# Altium PCB opo4.PcbDoc
Units mil, origin at the board's own origin, x right, y up, seen from the top; angles counter-clockwise.
Board outline 1300 x 1300 mil, 4 copper layers (Top Layer, Signal Layer 1, Signal Layer 2, Bottom Layer), stack 30.634 mil thick; 113 components, 90 nets, 438 pads, 181 vias.
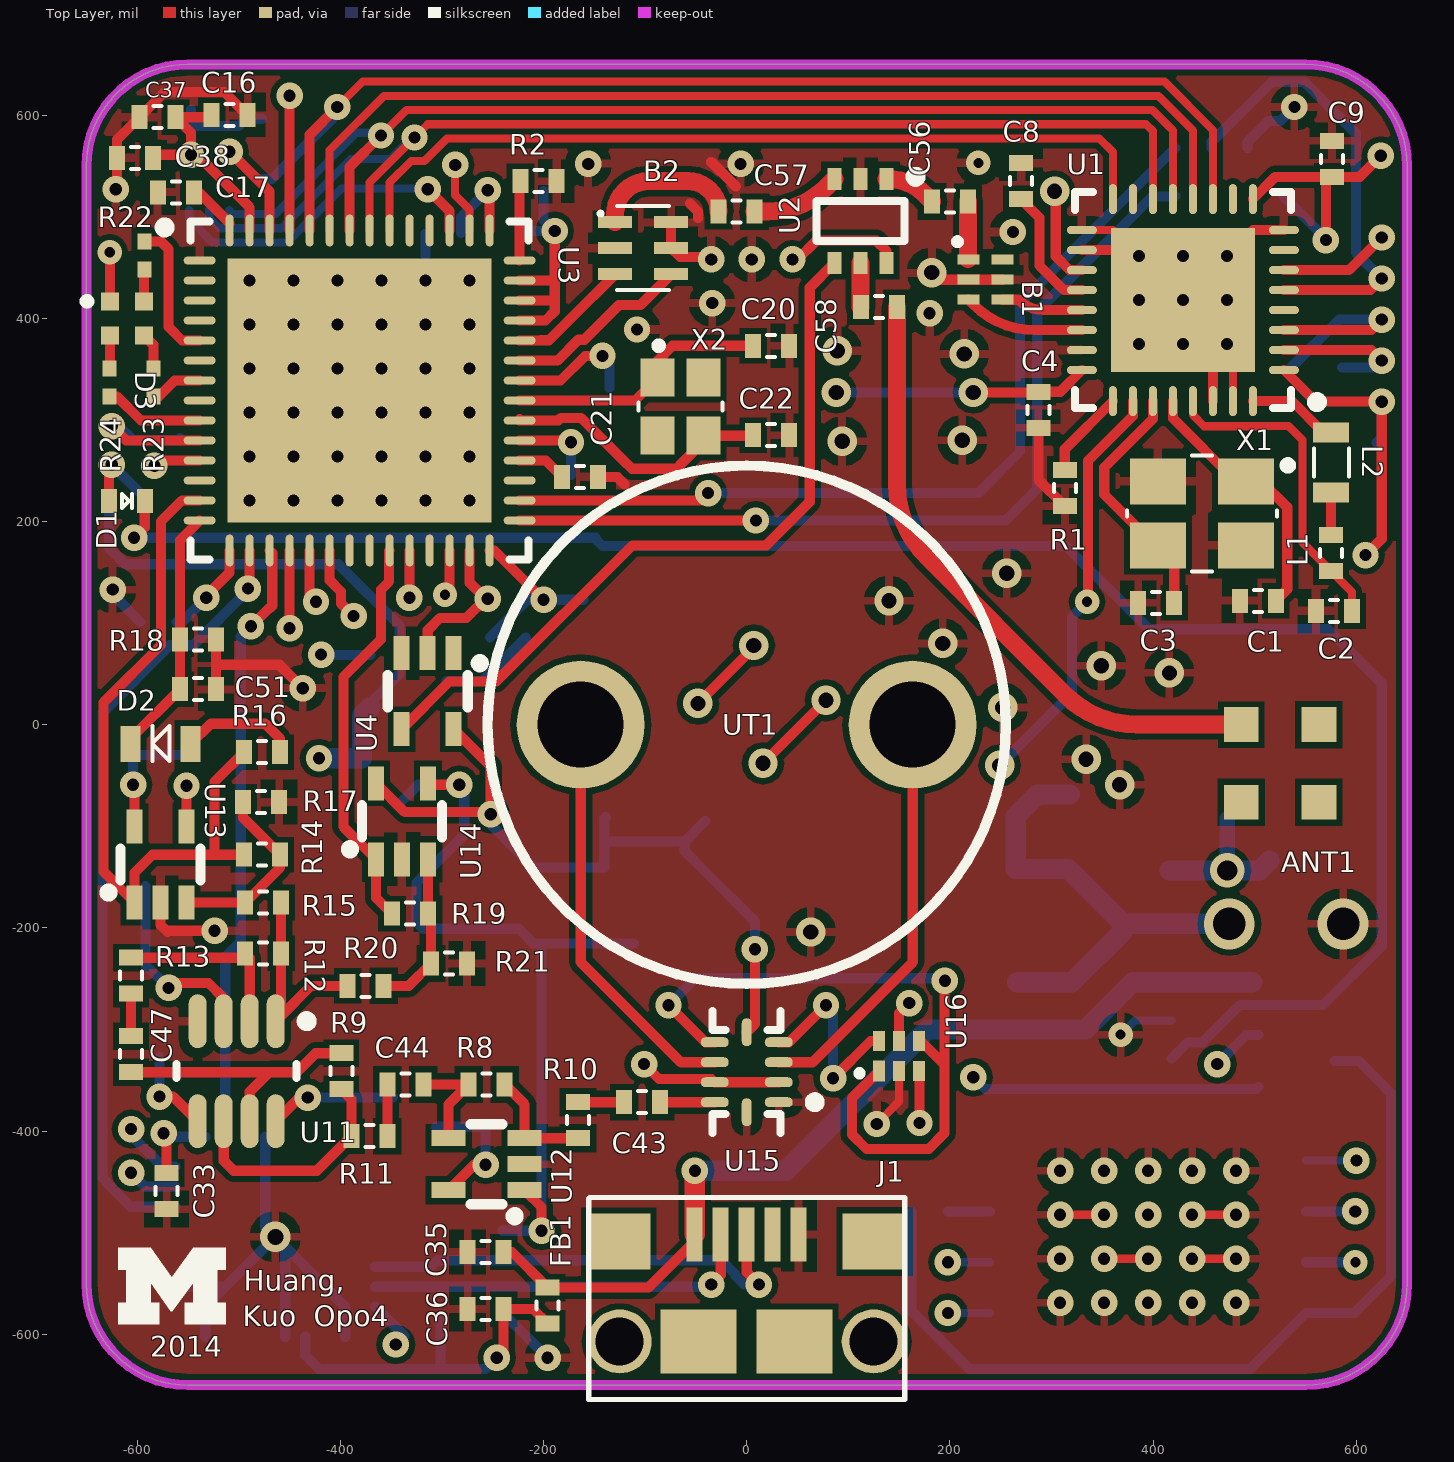
[diagram p0: Top Layer view]
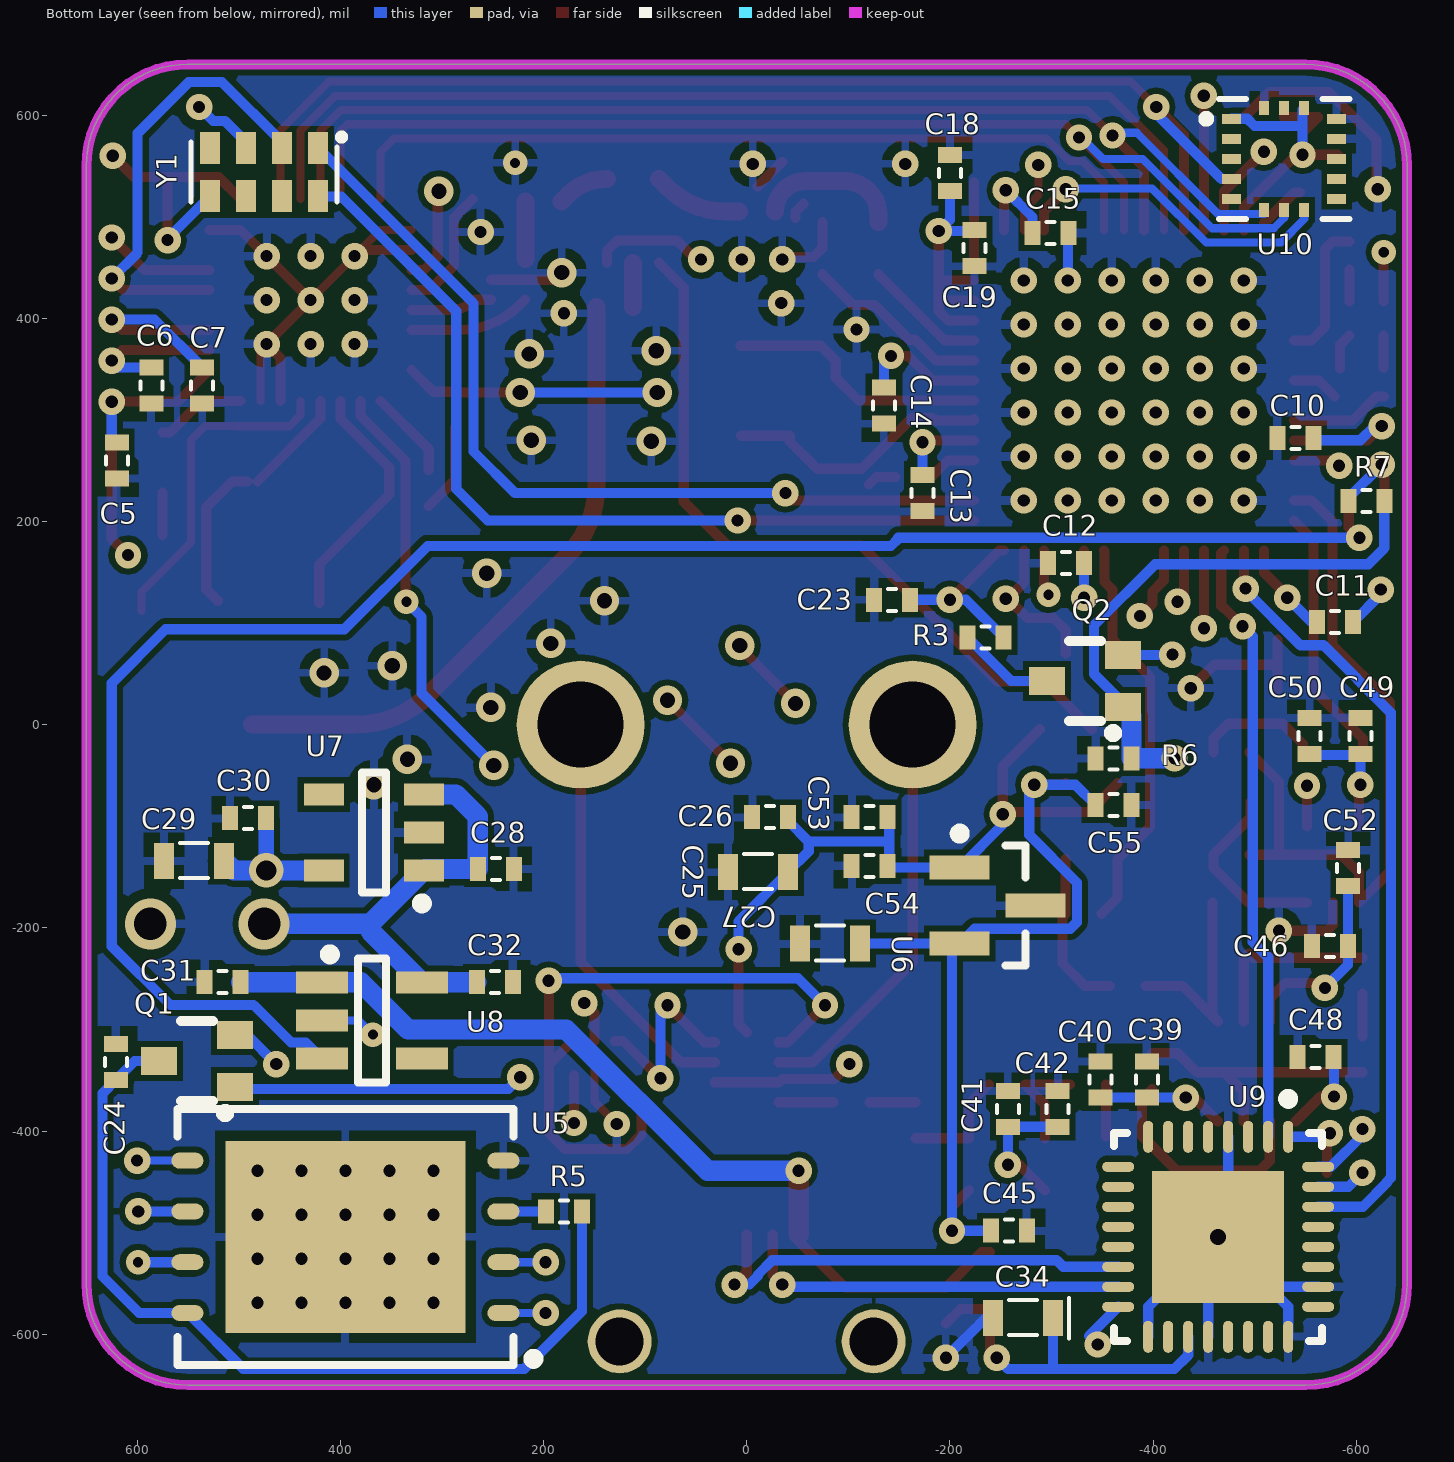
[diagram p1: Bottom Layer view, seen from below]
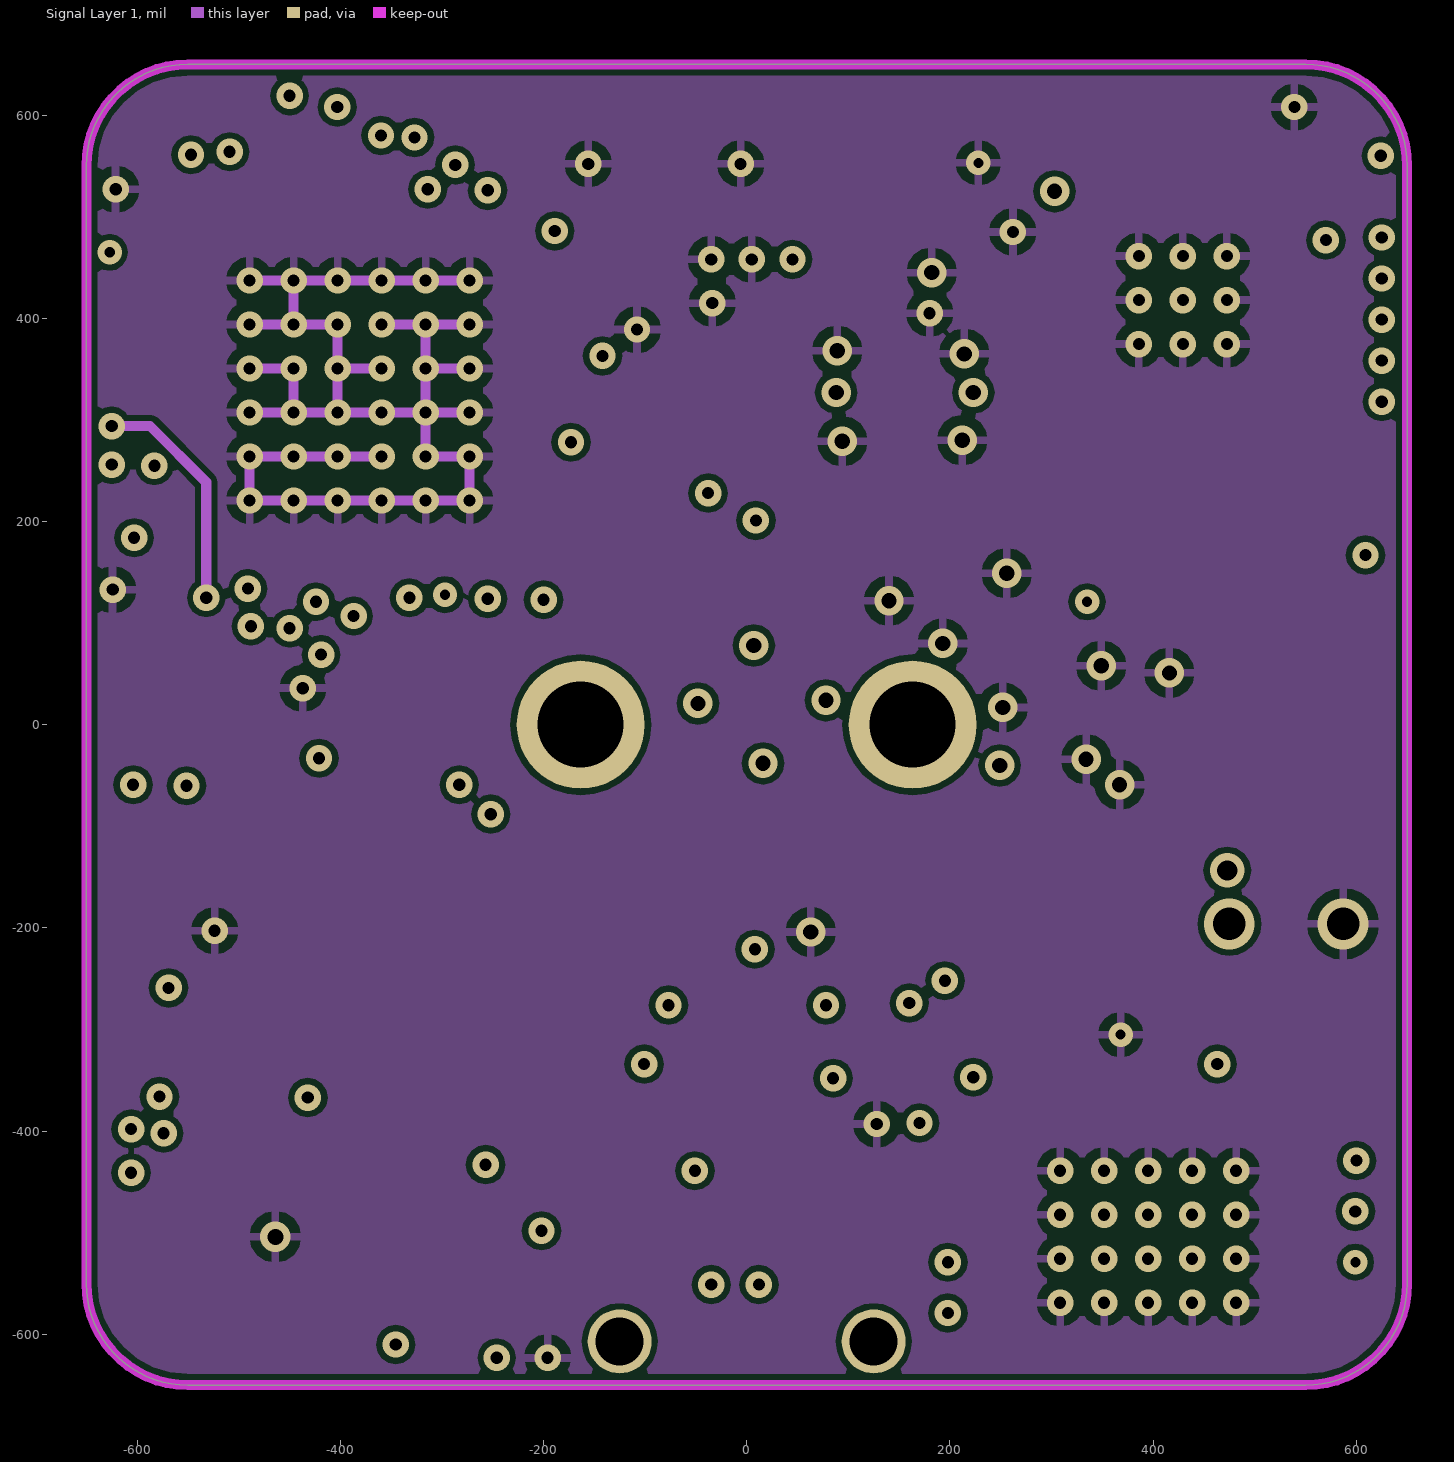
[diagram p2: Signal Layer 1]
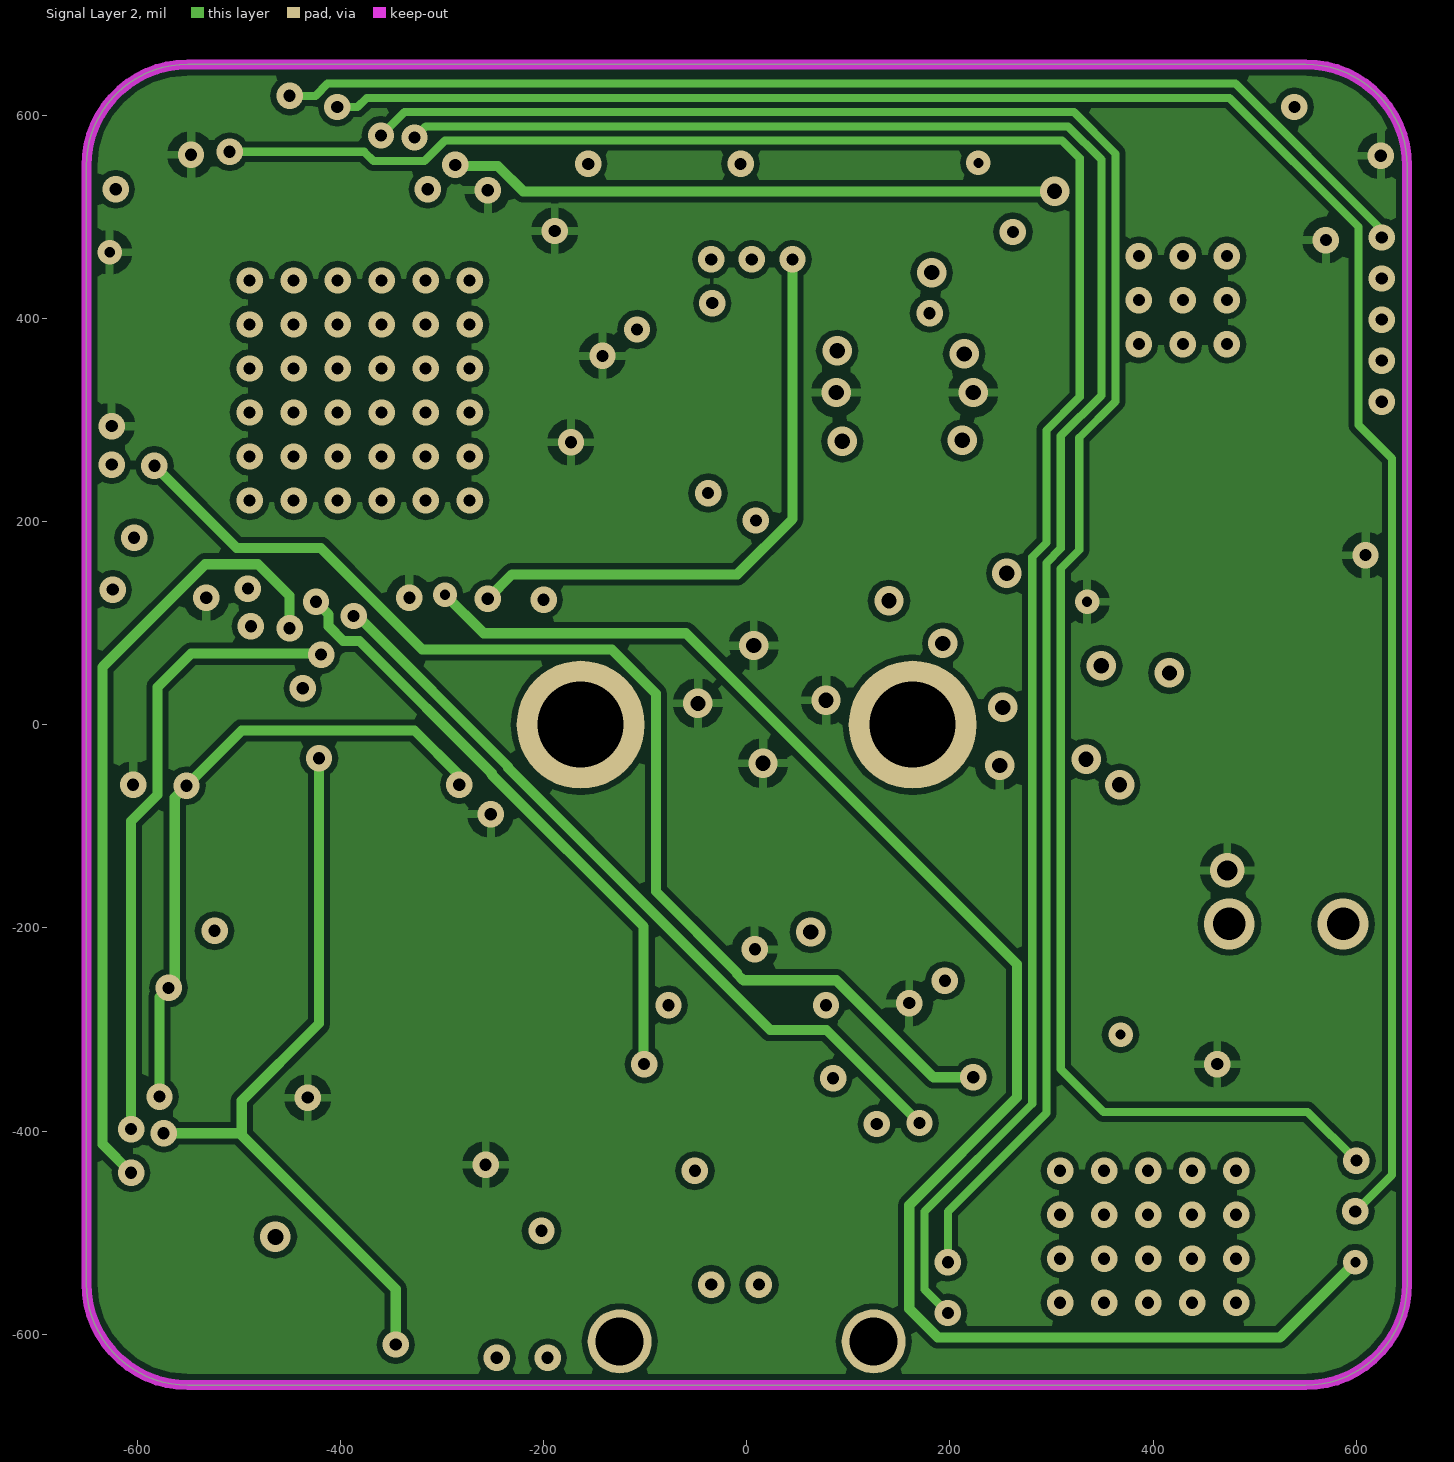
[diagram p3: Signal Layer 2]

## Layer stack, top to bottom
Top Solder: solder mask 0.4, Solder Resist, Dk 3.5
Top Layer: signal copper 1.4
Dielectric 1: core 10, FR-4, Dk 4.2
Signal Layer 1: signal copper 1.417
Dielectric 3: prepreg 5, Dk 4.2
Signal Layer 2: signal copper 1.417
Dielectric 2: core 10, Dk 4.2
Bottom Layer: signal copper 1.4
Bottom Solder: solder mask 0.4, Solder Resist, Dk 3.5

## Board outline
-550,-650 cw(c-550,-550) -650,-550 -650,550 cw(c-550,550) -550,650 550,650 cw(c550,550) 650,550 650,-550 cw(c550,-550) 550,-650

## Design rules (kind name [scope] priority, off if disabled: settings)
Clearance "Clearance~Sunstone Circuits" [All] p1: gap=6 // Sunstone Circuits Minimum Clearance Rule (MLB~4&6 Layer Designs)
DiffPairsRouting [All] p1: maxlimit=10 minlimit=10 mostfreqgap=10 toplayer_minwidth=10 toplayer_maxwidth=15 toplayer_prefwidth=15 midlayer1_minwidth=10 midlayer1_maxwidth=15 midlayer1_prefwidth=15 midlayer2_minwidth=10 midlayer2_maxwidth=15 midlayer2_prefwidth=15 bottomlayer_minwidth=10 bottomlayer_maxwidth=15 bottomlayer_prefwidth=15 maxuncoupledlength=500
HoleSize "HoleSize~Sunstone Circuits" [All] p1: absolutevalues=TRUE maxlimit=251 minlimit=8 maxpercent=80.000 minpercent=20.000 // Sunstone Circuits Hole Size Rule (MLB~4&6 Layer Designs)
HoleSize Testpoint [All] p2: absolutevalues=TRUE maxlimit=100 minlimit=1 maxpercent=80.000 minpercent=20.000
HoleSize TestPointUsage [All] p3: absolutevalues=TRUE maxlimit=100 minlimit=1 maxpercent=80.000 minpercent=20.000
MinimumAnnularRing "MinimumAnnularRing~Sunstone Circuits" [All] p1: minimumring=7 // Sunstone Circuits Minimum Annular Ring (MLB~4&6 Layer Designs)
MinimumSolderMaskSliver [All] p1 off: minsoldermaskwidth=10
PlaneClearance "PlaneClearance~Sunstone Circuits" [All] p1: clearance=12 // Sunstone Circuits Power Plane Clearance Rule (MLB~4&6 Layer Designs)
PlaneConnect "PlaneConnect~Sunstone Circuits" [All] p1: planeconnectstyle=Relief reliefexpansion=10 reliefentries=4 reliefconductorwidth=8 reliefairgap=10 // Sunstone Circuits Power Plane Connect Rule (MLB~4&6 Layer Designs)
PolygonConnect "PolygonConnect~Sunstone Circuits" [All] p1: connectstyle=Relief reliefconductorwidth=8 reliefentries=4 polygonreliefangle="90 Angle" airgapwidth=10 // Sunstone Circuits Polygon Connect Style (MLB~4&6 Layer Designs)
RoutingVias "RoutingVias~Sunstone Circuits" [All] p1: holewidth=16 width=30 viastyle="Through Hole" minholewidth=8 minwidth=24 maxholewidth=20 maxwidth=40 // Sunstone Circuits Routing Vias Rule (MLB~4&6 Layer Designs)
ShortCircuit "ShortCircuit~Sunstone Circuits" [All] p1: allowed=FALSE // Sunstone Circuits Short Circuit Rule~Do Not Allow (MLB~4&6 Layer Designs)
SilkToSolderMaskClearance [IsPad] p1 off: minsilkscreentomaskgap=10 clearancetoexposedcopper=TRUE
SolderMaskExpansion ViaTenting [isVia] p1: expansion=-20 // Sunstone Circuits Solder Mask Expansion Rule (MLB~4&6 Layer Designs)
SolderMaskExpansion "SolderMaskExpansion~Sunstone Circuits" [All] p2: expansion=3 // Sunstone Circuits Solder Mask Expansion Rule (MLB~4&6 Layer Designs)
UnpouredPolygon [All] p1: allowunpoured=FALSE
ViasUnderSMD "ViasUnderSMD~Sunstone Circuits" [All] p1: allowed=FALSE // Sunstone Circuits Vias Under SMD~Do Not Allow (MLB~4&6 Layer Designs)
Width "Width~Sunstone Circuits" [All] p1: maxlimit=100 minlimit=6 preferedwidth=10 // Sunstone Circuits Minimum Width Rule (MLB~4&6 Layer Designs)
22 further rules are at their usual default settings.

## Classes and differential pairs
component class bluetooth: B1 C1 C2 C3 C4 C5 C6 C7 C8 C9 L1 L2 R1 U1 X1
component class mcu: ANT1 B2 C10 C11 C12 C13 C14 C15 C16 C17 C18 C19 C20 C21 C22 C23 C24 C56 C57 C58 D3 Q1 Q2 R2 R3 R5 R6 R22 R23 R24 U2 U3 U4 U5 X2
component class power: C25 C26 C27 C28 C29 C30 U6 U7
component class programmer_charger: C31 C32 C33 C34 C35 C36 D1 FB1 J1 R7 U8 U9
component class rtc_accel: C37 C38 U10 Y1
component class ul_rx: C39 C40 C41 C42 C43 C44 C45 C46 C47 C48 C49 C50 C51 C52 C53 C54 C55 D2 R8 R9 R10 R11 R12 R13 R14 R15 R16 R17 R18 R19 R20 R21 U11 U12 U13 U14
component class ul_tx_ctrl: U15 U16 UT1
differential pair RF: +RF_P -RF_N
differential pair BLE_ANT: +BLE_ANT_P -BLE_ANT_N

## Components (designator, comment, footprint, x,y, rotation, side; value= is the part's Value field where it differs from the comment)
ANT1 "Ground Antenna" "SMD Ground Antenna" 525,-38 r270 top
B1 "2450BM14A0002" 2450BM14A0002 235,438 r90 top
B2 "BALUN" 2450BM15A0002 -102,469 r0 top
C1 "15pF 0402 ceramic cap" 0402 503,122 r180 top
C2 "Ceramic capacitor" 0402 578,112 r180 top
C3 "15pF 0402 ceramic cap" 0402 403,120 r0 top
C4 "Ceramic capacitor" 0402 287,310 r270 top
C5 "4.7uF" 0402 620,260 r270 bottom
C6 "Ceramic capacitor" 0402 586,334 r270 bottom
C7 "33nF" 0402 536,334 r270 bottom
C8 "2.2nF" 0402 270,535 r90 top
C9 "Ceramic capacitor" 0402 576,557 r90 top
C10 "Ceramic capacitor" 0402 -540,282 r0 bottom
C11 "Ceramic capacitor" 0402 -579,101 r180 bottom
C12 "Ceramic capacitor" 0402 -314,159 r0 bottom
C13 "Ceramic capacitor" 0402 -173,228 r270 bottom
C14 "Ceramic capacitor" 0402 -135,314 r270 bottom
C15 "Ceramic capacitor" 0402 -299,484 r180 bottom
C16 "Ceramic capacitor" 0402 -509,600 r0 top
C17 "Ceramic capacitor" 0402 -562,524 r180 top
C18 "Ceramic capacitor" 0402 -200,543 r90 bottom
C19 "220pF 0402 ceramic cap" 0402 -224,469 r270 bottom
C20 "13pf 0402 Cap" 0402 24,373 r0 top
C21 "Ceramic capacitor" 0402 -164,244 r0 top
C22 "13pf 0402 Cap" 0402 24,285 r180 top
C23 "Ceramic capacitor" 0402 -143,123 r0 bottom
C24 "Ceramic capacitor" 0402 621,-332 r270 bottom
C25 "Ceramic capacitor" 0603 -11,-145 r0 bottom
C26 "Ceramic capacitor" 0402 -23,-91 r0 bottom
C27 "Ceramic capacitor" 0603 -82,-215.4 r0 bottom
C28 "Ceramic capacitor" 0402 247,-142 r180 bottom
C29 "Ceramic capacitor" 0603 544,-134 r0 bottom
C30 "Ceramic capacitor" 0402 491,-92 r0 bottom
C31 "Ceramic capacitor" 0402 516,-253 r0 bottom
C32 "Ceramic capacitor" 0402 248,-253 r180 bottom
C33 "Ceramic capacitor" 0402 -571,-459 r270 top
C34 "Tantalum capacitor" "0603 - Polar Marking" -272,-584 r0 bottom
C35 "Ceramic capacitor" 0402 -257,-519 r180 top
C36 "Ceramic capacitor" 0402 -257,-575 r180 top
C37 "Ceramic capacitor" 0402 -580,598 r180 top
C38 "Ceramic capacitor" 0402 -602,558 r180 top
C39 "Ceramic capacitor" 0402 -394,-349 r90 bottom
C40 "Ceramic capacitor" 0402 -348,-349 r90 bottom
C41 "Ceramic capacitor" 0402 -257,-378 r90 bottom
C42 "Ceramic capacitor" 0402 -306,-378 r90 bottom
C43 "Ceramic capacitor" 0402 -103,-371.53 r180 top
C44 "Ceramic capacitor" 0402 -336,-354 r180 top
C45 "Ceramic capacitor" 0402 -258,-498 r180 bottom
C46 "Ceramic capacitor" 0402 -574,-218 r0 bottom
C47 "Ceramic capacitor" 0402 -606,-324.28 r90 top
C48 "Ceramic capacitor" 0402 -560,-327 r0 bottom
C49 "Ceramic capacitor" 0402 -604,-11 r90 bottom
C50 "Ceramic capacitor" 0402 -554,-11 r90 bottom
C51 "Ceramic capacitor" 0402 -540,35 r0 top
C52 "Ceramic capacitor" 0402 -592,-141 r90 bottom
C53 "Ceramic capacitor" 0402 -121,-91 r0 bottom
C54 "Ceramic capacitor" 0402 -121,-139 r0 bottom
C55 "Ceramic capacitor" 0402 -361,-79 r180 bottom
C56 "Ceramic Capacitor" 0402 200,515 r180 top
C57 "Ceramic Capacitor" 0402 -10,505 r180 top
C58 "Ceramic Capacitor" 0402 130,411 r0 top
D1 "LED, Green" "0402 - DIODE" -610,220 r0 top
D2 "Schottky diode" "0603 - DIODE" -577,-19 r180 top
D3 "Tri Color LED" 0404 -610,400 r0 top
FB1 "Ferrite Bead" 0402 -196,-571.72 r90 top
J1 "micro USB-B" "Micro USB-B" 0,-607 r0 top
L1 "15nH chip inductor" 0402 575,169 r90 top
L2 "10uH chip inductor" 0603 575,258 r90 top
Q1 "DMG1013UW" SC70-3 541,-331 r90 bottom
Q2 "Si1300BDL" SC70-3 -333,43 r90 bottom
R1 "22k 0402 resistor" 0402 313,233 r270 top
R2 "56k 0402 Res" 0402 -205,535 r0 top
R3 "2.2 Ohm 0402 Res" 0402 -235,86 r0 bottom
R5 "Chip resistor" 0402 180,-479 r0 bottom
R6 "Chip resistor" 0402 -361,-33 r0 bottom
R7 "Chip resistor" 0402 -610,220 r0 bottom
R8 "Chip resistor" 0402 -256,-354 r180 top
R9 "Chip resistor" 0402 -399,-341 r90 top
R10 "Chip resistor" 0402 -166,-389.24 r270 top
R11 "Chip resistor" 0402 -371.43,-405 r180 top
R12 "Chip resistor" 0402 -476,-225 r0 top
R13 "Chip resistor" 0402 -606,-247 r270 top
R14 "Chip resistor" 0402 -477,-127.93 r180 top
R15 "Chip resistor" 0402 -476,-175 r180 top
R16 "Chip resistor" 0402 -477,-27 r0 top
R17 "Chip resistor" 0402 -478,-76 r0 top
R18 "Chip resistor" 0402 -540,84 r0 top
R19 "Chip resistor" 0402 -331.43,-186 r180 top
R20 "Chip resistor" 0402 -375,-257 r0 top
R21 "Chip resistor" 0402 -293,-235 r0 top
R22 "Chip Resistor" 0201 -593,462 r90 top
R23 "Chip resistor" 0201 -584,337 r270 top
R24 "Chip resistor" 0201 -627,337 r270 top
U1 "nrf8001" QFN50P500X500X90_HS-33N 429.31,418 r180 top
U2 "uPG2214TB" minimold-6 112,496 r270 top
U3 "cc2538" QFN50P800X800X100_HS-57N -381,329 r0 top
U4 "NC7S14P5X" SC70-5 -314,33 r180 top
U5 "SST25VF064C" WSON 395,-504 r0 bottom
U6 "ISL60002" SOT23-3N -247,-178 r180 bottom
U7 "ADP162" TSOT23-5 367,-106 r0 bottom
U8 "MAX1555" SOT23-5 369,-291 r180 bottom
U9 "FT232RQ" QFN-32 -464,-504 r270 bottom
U10 "ADXL362" LGA_CC-16-4 -529,557 r180 bottom
U11 "MIC863" TSOP65P280X145-8N -502,-341 r270 top
U12 "MIC861" SC70-5 -256,-432.55 r90 top
U13 "TS881" SC70-5 -577,-137.6 r0 top
U14 "TS881" SC70-5 -339.31,-95 r0 top
U15 "NX3L4684" QFN50P155X200X13-10N 0,-342 r180 top
U16 "NC7WZ14L6X" NC7WZ14L6X 150,-326 r0 top
UT1 "400EP250" "Transducer recepticle" 0,0 r0 top
X1 "16MHz Crystal" TSX-3225 448,208 r180 top
X2 "32 MHz Crystal" FA-128 -65,313 r270 top
Y1 "RV-4162-C7" RV4162 475,544 r0 bottom

## Footprints (in the part's own frame and the unit in brackets; to place one, negate y for a bottom-side part, rotate by r counter-clockwise, add the part's x,y. Pads: shape width x height; smd on the part's side, far side on the other; paste and mask are expansions set on the pad)
0201 [mm] "Chip Resistor, 2-Leads, Body 0.60x0.30mm, IPC Medium Density"
  rect 0.4x0.35 smd: 1(-0.35,0) 2(0.35,0)
  body extent -0.31,-0.16 0.32,0.17, height 0.26
0402 [mm] "2-Leads, Body 1.00x0.50mm, IPC Medium Density"
  rect 0.4x0.6 smd: 1(-0.45,0) 2(0.45,0)
  silkscreen extent -0.1,-0.28 0.1,0.28, body extent -0.53,-0.28 0.53,0.27, height 0.4
"0402 - DIODE" [mm] "2-Leads, Body 1.00x0.50mm, IPC Medium Density"
  rect 0.4x0.6 smd: 1(-0.45,0) 2(0.45,0)
  silkscreen extent -0.13,-0.18 0.13,0.18, body extent -0.53,-0.28 0.53,0.27, height 0.4
0404 [mm]
  rect 0.45x0.45 smd: 1(-0.425,0.425) 2(0.425,0.425) 3(0.425,-0.425) 4(-0.425,-0.425)
  silkscreen extent -1.06,0.37 -0.94,0.48, body extent -0.5,-0.5 0.5,0.5, height 0.2
0603 [mm] "2-Leads, Body 1.55x0.85mm, IPC Medium Density"
  rect 0.5x0.9 smd: 1(-0.75,0) 2(0.75,0)
  silkscreen extent -0.35,-0.45 0.35,0.43, body extent -0.75,-0.42 0.75,0.43, height 0.5
"0603 - DIODE" [mm] "2-Leads, Body 1.55x0.85mm, IPC Medium Density"
  rect 0.5x0.9 smd: 1(-0.75,0) 2(0.75,0)
  silkscreen extent -0.23,-0.45 0.2,0.43, body extent -0.75,-0.42 0.75,0.43, height 0.5
"0603 - Polar Marking" [mm] "2-Leads, Body 1.55x0.85mm, IPC Medium Density"
  rect 0.5x0.9 smd: 1(-0.75,0) 2(0.75,0)
  silkscreen extent -1.14,-0.51 0.35,0.51, body extent -0.75,-0.42 0.75,0.43, height 0.5
2450BM14A0002 [mm]
  rect 0.25x0.55 smd: 1(0.5,0.425) 2(0,0.425) 3(-0.5,0.425) 4(-0.5,-0.425) 5(0,-0.425) 6(0.5,-0.425)
  silkscreen extent 0.91,0.66 0.99,0.74, body extent -0.8,-0.4 0.8,0.4, height 0.6
2450BM15A0002 [mm] "Chip Array, Flat, 6-Leads, Pitch 0.65mm,  Body 2.00x1.25mm,  IPC Medium Density"
  rect 0.85x0.3 smd: 1(-0.7,0.65) 2(-0.7,0) 3(-0.7,-0.65) 4(0.7,-0.65) 5(0.7,0) 6(0.7,0.65)
  silkscreen extent -1.11,-1.05 0.65,1.05, body extent -0.67,-1.05 0.67,1.05, height 0.81
FA-128 [mm]
  rect 0.95x0.85 smd: 1(-0.725,-0.575) 2(0.725,-0.575) 3(0.725,0.575) 4(-0.725,0.575)
  silkscreen extent -1.58,-1.05 0.1,1.05
LGA_CC-16-4 [mm]
  rect 0.475x0.25 smd: 1(-1.313,1) 2(-1.313,0.5) 3(-1.313,0) 4(-1.313,-0.5) 5(-1.313,-1) 9(1.313,-1) 10(1.313,-0.5) 11(1.313,0) 12(1.313,0.5) 13(1.313,1)
  rect 0.25x0.35 smd: 6(-0.5,-1.275) 7(0,-1.275) 8(0.5,-1.275) 14(0.5,1.275) 15(0,1.275) 16(-0.5,1.275)
  silkscreen extent -2.02,-1.5 1.63,1.5, body extent -1.63,-1.5 1.63,1.5, height 1.15
"Micro USB-B" [mm]
  rect 0.4x1.35 smd mask+0.1: 1(-1.3,2.675) 2(-0.65,2.675) 3(0,2.675) 4(0.65,2.675) 5(1.3,2.675)
  rect 1.6x1.4 smd mask+0.1: 6(-3.2,2.5) 6(3.2,2.5)
  round 1.6 hole 1.2: 6(-3.175,0) 6(3.175,0)
  rect 1.9x1.6 smd mask+0.1: 6(-1.2,0) 6(1.2,0)
  silkscreen extent -3.95,-1.45 3.95,3.6
minimold-6 [mm] "SOTFL, 6-Leads, Body 2.00x2.10mm, Pitch 0.65mm, IPC Medium Density"
  rect 0.55x0.35 smd: 1(-1.05,0.65) 2(-1.05,0) 3(-1.05,-0.65) 4(1.05,-0.65) 5(1.05,0) 6(1.05,0.65)
  silkscreen extent -1.22,-1.1 0.5,1.5, body extent -0.67,-1.1 0.67,1.1, height 1
NC7WZ14L6X [mm]
  rect 0.3x0.52 smd: 1(-0.5,-0.375)
  rect 0.3x0.49 smd: 2(0,-0.375) 3(0.5,-0.375) 4(0.5,0.375) 5(0,0.375) 6(-0.5,0.375)
  silkscreen extent -1.02,-0.46 -0.97,-0.41, body extent -0.72,-0.5 0.72,0.5, height 0.55
QFN50P155X200X13-10N [mm] "QFN, 10-Leads, Body 2.1x1.6mm (max), Pitch 0.50mm, IPC Medium Density"
  oval 0.7x0.25 smd: 1(-0.8,0.75) 2(-0.8,0.25) 3(-0.8,-0.25) 4(-0.8,-0.75) 6(0.8,-0.75) 7(0.8,-0.25) 8(0.8,0.25) 9(0.8,0.75)
  oval 0.25x0.7 smd: 5(0,-1) 10(0,1)
  silkscreen extent -1.83,-1.53 0.85,1.53, body extent -0.83,-1.05 0.82,1.05, height 0.13
QFN50P500X500X90_HS-33N [mm] "QFN, 32-Leads, Body 5.00x5.00mm, Pitch 0.50mm, Thermal Pad 3.60x3.60mm, IPC Medium Density"
  oval 0.75x0.2 smd: 1(-2.525,1.75) 2(-2.525,1.25) 3(-2.525,0.75) 4(-2.525,0.25) 5(-2.525,-0.25) 6(-2.525,-0.75) 7(-2.525,-1.25) 8(-2.525,-1.75) 17(2.525,-1.75) 18(2.525,-1.25) 19(2.525,-0.75) 20(2.525,-0.25) 21(2.525,0.25) 22(2.525,0.75) 23(2.525,1.25) 24(2.525,1.75)
  oval 0.2x0.75 smd: 9(-1.75,-2.525) 10(-1.25,-2.525) 11(-0.75,-2.525) 12(-0.25,-2.525) 13(0.25,-2.525) 14(0.75,-2.525) 15(1.25,-2.525) 16(1.75,-2.525) 25(1.75,2.525) 26(1.25,2.525) 27(0.75,2.525) 28(0.25,2.525) 29(-0.25,2.525) 30(-0.75,2.525) 31(-1.25,2.525) 32(-1.75,2.525)
  rect 3.6x3.6 smd: 33(0,0)
  silkscreen extent -3.47,-2.7 2.7,2.7, body extent -2.55,-2.55 2.55,2.55, height 0.9
QFN50P800X800X100_HS-57N [mm] "QFN, 56-Leads, Body 8.00x8.00mm, Pitch 0.50mm, Thermal Pad 6.60x6.60mm, IPC Medium Density"
  oval 0.8x0.2 smd: 1(-4,3.25) 2(-4,2.75) 3(-4,2.25) 4(-4,1.75) 5(-4,1.25) 6(-4,0.75) 7(-4,0.25) 8(-4,-0.25) 9(-4,-0.75) 10(-4,-1.25) 11(-4,-1.75) 12(-4,-2.25) 13(-4,-2.75) 14(-4,-3.25) 29(4,-3.25) 30(4,-2.75) 31(4,-2.25) 32(4,-1.75) 33(4,-1.25) 34(4,-0.75) 35(4,-0.25) 36(4,0.25) 37(4,0.75) 38(4,1.25) 39(4,1.75) 40(4,2.25) 41(4,2.75) 42(4,3.25)
  oval 0.2x0.8 smd: 15(-3.25,-4) 16(-2.75,-4) 17(-2.25,-4) 18(-1.75,-4) 19(-1.25,-4) 20(-0.75,-4) 21(-0.25,-4) 22(0.25,-4) 23(0.75,-4) 24(1.25,-4) 25(1.75,-4) 26(2.25,-4) 27(2.75,-4) 28(3.25,-4) 43(3.25,4) 44(2.75,4) 45(2.25,4) 46(1.75,4) 47(1.25,4) 48(0.75,4) 49(0.25,4) 50(-0.25,4) 51(-0.75,4) 52(-1.25,4) 53(-1.75,4) 54(-2.25,4) 55(-2.75,4) 56(-3.25,4)
  rect 6.6x6.6 smd: 57(0,0)
  silkscreen extent -5,-4.23 4.23,4.23, body extent -4.08,-4.08 4.08,4.08, height 1
QFN-32 [mm] "32-Pin QFN 0.5 mm Pitch"
  oval 0.8x0.25 smd: 1(-2.5,1.75) 2(-2.5,1.25) 3(-2.5,0.75) 4(-2.5,0.25) 5(-2.5,-0.25) 6(-2.5,-0.75) 7(-2.5,-1.25) 8(-2.5,-1.75) 17(2.5,-1.75) 18(2.5,-1.25) 19(2.5,-0.75) 20(2.5,-0.25) 21(2.5,0.25) 22(2.5,0.75) 23(2.5,1.25) 24(2.5,1.75)
  oval 0.25x0.8 smd: 9(-1.75,-2.5) 10(-1.25,-2.5) 11(-0.75,-2.5) 12(-0.25,-2.5) 13(0.25,-2.5) 14(0.75,-2.5) 15(1.25,-2.5) 16(1.75,-2.5) 25(1.75,2.5) 26(1.25,2.5) 27(0.75,2.5) 28(0.25,2.5) 29(-0.25,2.5) 30(-0.75,2.5) 31(-1.25,2.5) 32(-1.75,2.5)
  rect 3.3x3.3 smd: 33(0,0)
  silkscreen extent -3.57,-2.6 2.6,2.6, body extent -2.58,-2.58 2.58,2.58, height 0.8
RV4162 [mm] "RTC"
  rect 0.5x0.8 smd: 1(-1.35,-0.6) 2(-0.45,-0.6) 3(0.45,-0.6) 4(1.35,-0.6) 5(1.35,0.6) 6(0.45,0.6) 7(-0.45,0.6) 8(-1.35,0.6)
  silkscreen extent -1.97,-0.91 1.83,0.75, body extent -1.6,-0.75 1.6,0.75, height 0.8
SC70-3 [mm]
  rect 0.7x0.9 smd: 1(-0.65,-0.95) 2(0.65,-0.95) 3(0,0.95)
  silkscreen extent -1.4,-0.8 1,0.4, body extent -0.9,-0.6 0.9,0.6, height 0.8
SC70-5 [mm]
  rect 0.4x0.85 smd: 1(-0.65,-0.95) 2(0,-0.95) 3(0.65,-0.95) 4(0.65,0.95) 5(-0.65,0.95)
  silkscreen extent -1.4,-0.8 1,0.4, body extent -0.9,-0.6 0.9,0.6, height 0.8
"SMD Ground Antenna" [mm] "0479480001"
  rect 0.87x0.87 smd mask+0.335: 1(-0.97,-0.97) 2(0.97,-0.97) 3(0.97,0.97) 4(-0.97,0.97)
  body extent -1.5,-1.5 1.5,1.5, height 4
SOT23-3N [mm] "SOT23, 3-Leads, Body 2.9x1.3mm, Pitch 0.95mm, Lead Span 2.5mm, IPC Medium Density"
  rect 1.5x0.6 smd: 1(-0.95,0.95) 2(-0.95,-0.95) 3(0.95,0)
  silkscreen extent -1.07,-1.5 0.7,1.92, body extent -0.7,-1.5 0.7,1.5, height 1.1
SOT23-5 [mm] "SOT23, 5-Leads, Body 2.9x1.6mm, Pitch 0.95mm, Lead Span 2.8mm, IPC High Density"
  rect 1.3x0.55 smd: 1(-1.25,0.95) 2(-1.25,0) 3(-1.25,-0.95) 4(1.25,-0.95) 5(1.25,0.95)
  silkscreen extent -1.18,-1.55 0.35,1.77, body extent -0.67,-1.5 0.65,1.5, height 1.45
"Transducer recepticle" [mm] "Transducer with Pin Recepticle"
  round 3.2 hole 2.15: 1(-4.15,0) 2(4.15,0)
  body extent -6.45,-6.49 6.5,6.49, height 14
TSOP65P280X145-8N [mm] "TSOP, 8-Leads, Body 2.90x1.60mm, Pitch 0.65mm, IPC Medium Density"
  oval 1.35x0.45 smd: 1(-1.25,0.975) 2(-1.25,0.325) 3(-1.25,-0.325) 4(-1.25,-0.975) 5(1.25,-0.975) 6(1.25,-0.325) 7(1.25,0.325) 8(1.25,0.975)
  silkscreen extent -1.37,-1.5 0.18,1.88, body extent -0.85,-1.5 0.85,1.5, height 1.45
TSOT23-5 [mm] "SOT23, 6-Leads, Body 3.0x2.9mm (max), Pitch 0.95mm, IPC Medium Density"
  rect 1x0.55 smd: 1(-1.25,0.95) 2(-1.25,0) 3(-1.25,-0.95) 4(1.25,-0.95) 5(1.25,0.95)
  silkscreen extent -1.32,-1.5 0.3,1.9, body extent -0.87,-1.5 0.87,1.5, height 1
TSX-3225 [mm]
  rect 1.4x1.15 smd: 1(-1.1,-0.8) 2(1.1,-0.8) 3(1.1,0.8) 4(-1.1,0.8)
  silkscreen extent -2.23,-1.45 1.88,1.45
WSON [mm] "QFN, 8-Leads, Body 8.00x6.00mm, Pitch 1.27mm, Thermal Pad 6.00x4.80mm, IPC Medium Density"
  oval 0.8x0.4 smd: 1(-3.95,1.905) 2(-3.95,0.635) 3(-3.95,-0.635) 4(-3.95,-1.905) 5(3.95,-1.905) 6(3.95,-0.635) 7(3.95,0.635) 8(3.95,1.905)
  rect 6x4.8 smd: 9(0,0)
  silkscreen extent -4.82,-3.2 4.2,3.2, body extent -4.05,-3.05 4.05,3.05, height 0.8

## Part data
ANT1: library part "Molex Antenna", "Molex 2.4 GHz SMD On-Ground Antenna"
B1: library part nrf8001_balun, "nrf8001 chip balun"
B2: library part cc2538_Balun, "Johanson CC253X Balun"
C1 C3: library part C_15p_0402_ceramic, "15pF, 2%, NP0, 0402"
C2 C16 C17 C21 C28 C30 C31 C32 C43: library part C_1u_0402_ceramic, "Ceramic capacitor, 1 uF, 0402 package"
C4 C23 C51: library part C_1000p_0402_ceramic, "Ceramic capacitor, 1000 pF, 0402 package"
C5: library part C_4.7u_0402_ceramic, "4.7 uF 10% 0402 6.3V X5R ceramic cap"
C6 C9 C10 C11 C12 C13 C14 C15 C18 C24 C26 C33 C35 C36 C37 C38 C39 C41 C45 C46 C48 C49 C52 C53 C55: library part C_0.1u_0402_ceramic, "Ceramic capacitor, 0.1u, 0402 package"
C7: library part C_0.033uF_0402_ceramic, "33nF 10% 0402 16V X7R ceramic cap"
C8: library part C_2.2n_0402_ceramic, "2.2nF 10% 50V X7R ceramic cap"
C19: library part C_220pf_0402_ceramic, "220pF 5% 50 V C0G NP0 0402 ceramic cap"
C20 C22: library part C_13p_0402, "13pf, 50V, 2%, c0G, NP0, 0402, ceramic"
C25 C27 C29: library part C_10u_0603_ceramic, "Ceramic capacitor, 10 uF, 0603 package"
C34: library part C_4.7u_0603_tantalum, "Tantalum capacitor, 4.7 uF, 0603 package"
C40 C42 C50 C54: library part C_10u_0402_ceramic, "Ceramic capacitor, 10 uF, 0402 package"
C44 C47: library part C_47p_0402_ceramic, "Ceramic capacitor, 47 pF, 0402 package"
C56 C57 C58: library part C_39pf_0402_ceramic, "Ceramic capacitor, 0402, 39 pF, 5%, C0G, NP0, RF suitable"
D1: library part D_LED_GREEN_0402, "LED, Green,  0402"
D2: library part D_SCHOTTKY_30V_0.1A_0603, "Schottky diode 30 V 0.1 A 0603"
D3: library part D_LED_RGB_0404, "LED, RGB, 0404"
FB1: library part FB_150mA_0402, "Ferrite Bead, 150 mA, 0402 package"
J1: library part "Micro USB", "CONN USB MICRO B RECPT SMT R/A"
L1: library part L_15nH_0402, "15 nH, 5%, 460mOhm, 2.3Ghz, 0402 chip inductor"
L2: library part L_10u_0603, "10uH, 10%, 32MHz, 468 mOhm, 0603, chip inductor"
Q1: "P-CHANNEL ENHANCEMENT MODE MOSFET"
Q2: "MOSFET N-CH D-S 20V SC-70-3"
R1: library part R_22k_0402, "22k 1% .063W 0402 resistor"
R2: library part R_56K_0402, "56 kOhm, 1%, .0603 W, 0402"
R3: library part R_2.2_0402, "2.2 Ohm, 1%, .063W, 0402"
R5 R6 R10 R11 R13: library part R_100K_0402, "Chip resistor, 100K, 0402 package"
R7: library part R_1K_0402, "Chip resistor, 1K, 0402 package"
R8 R9 R12: library part R_1M_0402, "Chip resistor, 1M, 0402 package"
R14 R19: library part R_1.24M_0402, "Chip resistor, 1.24M, 0402 package"
R15 R20: library part R_37.4K_0402, "Chip resistor, 37.4K, 0402 package"
R16: library part R_27K_0402, "Chip resistor, 27K, 0402 package"
R17: library part R_422K_0402, "Chip resistor, 422K, 0402 package"
R18 R21: library part R_270K_0402, "Chip resistor, 270K, 0402 package"
R22: library part R_40.2_0201, "40.2 Ohm 0201 1% Chip Resistor"
R23: library part R_60.4_0201, "60.4 Ohm, .05W, 1% 0201 Chip Resistor"
R24: library part R_240_0201, "240 Ohm, 1%, .05W, 0201 Chip Resistor"
U1: "nrf8001 Bluetooth SPI module"
U2: "GaAs Integrated Circuit for L, S-Band SPDT Switch"
U3: "cc2538 MCU/802.15.4 radio"
U4: "Single Inverter"
U5: "64 Mbit SPI Serial Dual I/O Flash"
U6: "IC VREF SERIES PREC SOT-23-3"
U7: "Ultralow Quiescent Current,  150 mA, CMOS Linear Regulators"
U8: "3 Dual-Input USB/AC Adapter 1-Cell Li+  Battery Chargers"
U9: library part IC_FT232RQ, "FT232R USB UART"
U10: "Micropower, 3-Axis, ±2 g/±4 g/±8 g  Digital Output MEMS Accelerometer"
U11: "Dual Ultra Low Power Op Amp in SOT23-8"
U12: "IC OPAMP 400KHZ 2.7V ULT LP SC70"
U13 U14: "Rail-to-rail 1.1 V nanopower comparator"
U15: "IC ANALOG SWITCH SPDT 10XQFN"
U16: "1 uA supply current, 50 mA output current, Dual inverter"
UT1: library part Tranducer, "Air Ultrasounic Ceramic Transducers"
X1: library part TSX-3225, "3.2x2.5mm 16MHz SMD crystal"
X2: library part X_32M_FA-128, "32MHz, 10ppm, 10pF, 60 Ohm"
Y1: "Real Time Clock Module with I2C Bus"

## Via types
v1: diameter 26, hole 12, Top Layer to Bottom Layer, 149 vias
v2: diameter 29, hole 15, Top Layer to Bottom Layer, 22 vias
v3: diameter 24, hole 10, Top Layer to Bottom Layer, 6 vias
v4: diameter 50, hole 32, Top Layer to Bottom Layer, 2 vias
v5: diameter 30, hole 15.75, Top Layer to Bottom Layer, tented top, 1 vias
v6: diameter 34, hole 20, Top Layer to Bottom Layer, 1 vias

## Nets (pads, with @x,y where several pads share a name; then routed paths per layer and width w, separated by ;. In a path a pad name is that pad's centre, name@x,y a point inside that pad or via, vN(x,y) a via of type N, cw(c..) or ccw(c..) an arc to the next point about the centre after c; other vN are vias at no path point)
ACCER_CS: U3.45 U10.8 | length 326.7
  Top Layer w10: v1(-314,527) -292.42,505.42 U3.45
  Signal Layer 2 w10: v1(-314,527) v1@-313,526
  Bottom Layer w8: U10.8 -548.69,497.61 -525.78,474.7 -452.23,474.7 -398.97,527.97 -314.97,527.97 v1(-314,527)
ACCER_INT_1: U10.11
ACCER_INT_2: U10.9
AMP1_OUT: C44.1 R8.2 U12.4 | length 105.7
  Top Layer w10: C44.1 R8.2 -293.4,-373.69 U12.4
AMP2_OUT: C47.1 R9.2 U11.7 | length 270.9
  Top Layer w10: C47.1 -470,-342 ; U11.7 -489.2,-361.2 -470,-342 ; R9.2 -424.28,-323.28 -443,-342 -470,-342
AMP3_OUT: R12.2 R15.1 R20.1 U11.1 | length 196.8
  Top Layer w10: U11.1 U11.1@-458.28,-286.46 ; R15.1 R12.2 U11.1@-458.28,-286.46 ; R20.1 -428.83,-257 U11.1@-458.28,-286.46
BLE_ACTIVE: U1.6 U3.53 | length 1389
  Top Layer w10: U3.53 v1(-449.9,619) ; U1.6 592.93,447.53 v1(625,479.6)
  Signal Layer 2 w8: v1(-449.9,619) -424.53,619 -412.53,631 481,631 625,487 v1(625,479.6)
BLE_ANT_N: B1.3 U1.22 | length 120.3
  Top Layer w10: B1.3 223.27,413.31 ccw(c283.24,473.29) 283.24,388.47 U1.22
BLE_ANT_P: B1.4 U1.21 | length 80.9
  Top Layer w10: B1.4 267.56,418.32 ccw(c292.08,442.84) 292.08,408.16 U1.21
BLE_RDYN: U1.16 U3.48 | length 828.8
  Top Layer w8: U3.48 -351.47,533.73 -330.2,555 -317,555 -295,577 347,577 360.41,563.59 U1.16
BLE_REQN: U1.12 U3.51 | length 1032.5
  Top Layer w8: U3.51 -410.53,565.47 -357,619 405.2,619 439.15,585.05 U1.12
CC2538_RESET_N: C23.1 R3.1 U3.28 | length 180.5
  Top Layer w10: U3.28 -248.52,171.52 v1(-200,123)
  Bottom Layer w10: R3.1 -215.72,123 v1(-200,123) C23.1
CC2538_UBAL: B2.1 C57.2 | length 145.4
  Top Layer w17.7: B2.1 -129.56,502.44 cw(c-97,502.44) -97,535 -57.72,535 cw(c-57.72,505) C57.2
CHG: D1.2 U8.3 | length 1839.8
  Top Layer w10: v1(-603,184) -592.59,194.41 -592.59,219.69 D1.2
  Bottom Layer w10: v1(-603,184) -149,184 -149,183 -142,176 314,176 396.04,93.96 572.04,93.96 625,41 625,-218 567.19,-275.81 485.38,-275.81 448.36,-312.83 433.79,-312.83 U8.3
COMP1_OUT: R14.2 R16.1 U3.13 U13.1 | length 715.4
  Top Layer w10: U3.13 -556,220.73 -576.59,200.14 -576.59,78.41 -633,22 -633,-144.59 U13.1 -602.59,-145.59 -584.93,-127.93 -524,-127.93 ; R14.2 -524,-127.93 ; R16.1 -524,-56.28 -524,-127.93
COMP2_OUT: R19.2 U3.23 U14.1 | length 396.2
  Top Layer w10: U3.23 -352,170.99 -352,141 -360,133 -360,84 -397,47 -397,-100.3 U14.1 -364.9,-170.25 R19.2
DCOUPL2: C21.1 U3.32 | length 48.5
  Top Layer w10: U3.32 -197.82,260.1 C21.1
FLASH_CS: U3.54 U5.1 | length 2200.7
  Top Layer w10: v1(-509,564) -469.58,524.58 U3.54
  Signal Layer 2 w8: v1(-509,564) -376.53,564 -367.53,555 -317,555 -297,575 310.4,575 327.7,557.7 327.7,322.52 295,289.82 295,179.12 281,165.12 281,-373 175,-479 175,-556 v1(198,-579)
  Bottom Layer w8: v1(198,-579) U5.1
FLASH_HOLD: U3.26 U5.7 | length 1671.9
  Top Layer w10: v3(-297,128) -292.42,132.58 U3.26
  Signal Layer 2 w10: v3(-297,128) -258.99,89.99 -59.76,89.99 266,-235.77 266,-366.79 160,-472.79 160,-574.94 188.06,-603 525,-603 v3(599,-529)
  Bottom Layer w10: U5.7 v3(599,-529)
FLASH_PWR: Q1.1 U3.11 | length 1501.8
  Top Layer w10: v1(-583,255) -577.9,260.1 U3.11
  Signal Layer 2 w10: v1(-583,255) -502,174 -419.35,174 -319.34,73.99 -132.74,73.99 -89.39,30.65 -89.39,-164.13 -9.53,-244 ; -9.53,-245.29 -3.32,-251.5 88.15,-251.5 183.65,-347 v1(223,-347)
  Bottom Layer w10: v1(223,-347) 234.59,-358.59 501.6,-358.59 Q1.1
FLASH_WP: R5.2 U5.3 | length 41.8
  Bottom Layer w10: R5.2 U5.3
GND: B1.2 B1.5 B2.2 B2.5 B2.6 C1.2 C2.2 C3.1 C4.2 C5.2 C6.2 C7.2 C8.2 C9.2 C10.2 C11.2 C12.2 C13.2 C14.2 C15.2 C16.2 C17.2 C18.2 C19.2 C20.2 C21.2 C22.1 C23.2 C24.1 C25.2 C26.2 C27.2 C28.2 C29.2 C30.2 C31.2 C32.2 C33.2 C34.2 C35.2 C36.2 C37.2 C38.2 C39.2 C40.2 C41.2 C42.2 C45.2 C46.2 C48.2 C49.2 C50.2 C51.2 C52.2 C53.2 C54.2 C55.2 J1.5 R1.2 R2.2 R6.2 R17.2 R18.2 R21.2 U1.8 U1.17 U1.18 U1.23 U1.30 U1.31 U1.33 U2.2 U3.1 U3.57 U4.3 U5.4 U5.9 U6.3 U7.2 U8.2 U9.4 U9.17 U9.20 U9.24 U9.26 U9.33 U10.12 U10.13 U10.16 U11.4 U12.2 U13.2 U14.2 U15.1 U15.10 U16.2 X1.2 X1.4 Y1.3 | length 3708
  Top Layer w8: v1(128,-393) 150,-371 U16.2 ; v1(308.39,-482.35) v1(351.69,-482.35) ; U1.17 360.41,486.9 380.09,467.21 v1(386,461.31) v1(429.31,418) ; v1(351.69,-525.65) v1(395,-525.65) ; v1(438.31,-525.65) v1(481.61,-525.65) ; v1(438.31,-482.35) v1(481.61,-482.35) ; U1.31 U1.33@478.52,368.79
  Top Layer w10: v1(-621,527) -619.72,528.28 C38.2 -619.72,576 C37.2 -572.91,622.81 -514.29,622.81 -491.48,600 C16.2 ; U13.2 -577,-197 -570,-204 -568.73,-202.73 v1(-523.73,-202.73) ; C51.2 -522.28,59 ; R18.2 -522.28,59 ; v1(-437,36) -460,59 -522.28,59 ; C21.2 -127.63,244 -120.36,236.73 ; B2.6 B2.5 -65.76,460.32 -37.32,460.32 v1(-35,458) cw(c-37.41,455.59) v1@-34,455.59 ; -56,513 -47.96,504.96 -47.96,498.8 ; -35,554 -34.84,554 -10.76,529.92 ; v2(182,445) 189,438 B1.2 B1.5 ; C4.2 287,241.28 R1.2 ; U1.18 U1.33@380.09,467.21 ; U1.30 458.83,360.91 v1(472.61,374.69) v1(429.31,418) 498.2,486.9 U1.8
  Signal Layer 1 w10: v1(-489.27,307.35) v1(-445.96,307.35) ; v1(-489.27,350.65) v1(-445.96,350.65) v1(-445.96,307.35) ; v1(-489.27,393.96) v1(-445.96,393.96) ; v1(-489.27,437.27) v1(-445.96,437.27) ; v1(-359.35,264.04) v1(-402.65,264.04) v1(-445.96,264.04) v1(-489.27,264.04) v1(-489.27,220.73) v1(-445.96,220.73) v1(-402.65,220.73) v1(-359.35,220.73) v1(-316.04,220.73) v1(-272.73,220.73) v1(-272.73,264.04) v1(-316.04,264.04) v1(-316.04,307.35) ; v1(-359.35,350.65) v1(-402.65,350.65) ; v1(-359.35,393.96) v1(-316.04,393.96) ; v1(-272.73,307.35) v1(-316.04,307.35) ; v1(-272.73,350.65) v1(-316.04,350.65) ; v1(-272.73,393.96) v1(-316.04,393.96) ; v1(-272.73,437.27) v1(-316.04,437.27) v1(-359.35,437.27) v1(-402.65,437.27) v1(-445.96,437.27) ; v1(-445.96,307.35) v1(-402.65,307.35) ; v1(-445.96,393.96) v1(-402.65,393.96) v1(-402.65,350.65) ; v1(-445.96,393.96) v1(-445.96,437.27) ; v1(-402.65,307.35) v1(-359.35,307.35) v1(-316.04,307.35) ; v1(-402.65,307.35) v1(-402.65,350.65) ; v1(-316.04,307.35) v1(-316.04,350.65) ; v1(-316.04,350.65) v1(-316.04,393.96)
  Bottom Layer w8: v3(368,-305) 382,-291 U8.2
  Bottom Layer w10: v1(-624,133) -624,128.28 C11.2 ; U9.26 U9.33@-513.21,-553.21 ; U9.24 -532.9,-572.9 U9.33@-513.21,-553.21 ; U9.33@-473.84,-494.16 U9.4 ; v5(-464,-504) U9.33@-513.21,-553.21 ; U9.20 -454.16,-513.84 -395.1,-572.9 U9.17 ; v1@-317.72,438.94 v1(-316.04,437.27) C15.2@-316.04,483.32 ; C34.2@-235,-584 v1(-196,-623) ; Y1.3 492.72,573.34 513.75,594.37 525.37,594.37 v1(539,608)
  other v1: 308.39,-568.96 351.69,-568.96 395,-568.96 438.31,-568.96 481.61,-568.96 308.39,-525.65 395,-482.35 308.39,-439.04 351.69,-439.04 395,-439.04 438.31,-439.04 481.61,-439.04 386,374.69 429.31,374.69 -108,389 180,405 -34,415 386,418 472.61,418 5,458 429.31,461.31 472.61,461.31 262,485 -156,552 -6,552
  other v2: 63,-204 367,-59 334,-34 252,17 416,51 349,58 193,80 140,122 256,149 94,279 212,280 214,365 89,368
  other v3: 228,553
  other v4: 587,-196
I2C_SCL: U3.29 Y1.8 | length 880.2
  Top Layer w10: U3.29 v1(9,201.05)
  Bottom Layer w10: v1(9,201.05) 255.05,201.05 286,232 286,407 399,520 421.47,520 Y1.8
I2C_SDA: U3.30 Y1.1 | length 874.4
  Top Layer w10: U3.30 -45.27,220.73 v1(-38,228)
  Bottom Layer w10: v1(-38,228) 228,228 269,269 269,414.77 Y1.1
INTEGRATOR_OUT: C51.1 D2.2 R18.1 U3.14 | length 248.2
  Top Layer w10: D2.2 -606.53,-13.81 C51.1 R18.1 -557.72,181.81 U3.14
LED_BLUE: D3.3 R23.1 | length 36.3
  Top Layer w10: D3.3 -584,374 R23.1
LED_GREEN: D3.4 R24.1 | length 32.2
  Top Layer w10: R24.1@-626.73,351.05 D3.4
LED_RED: D3.2 R22.1 | length 31.2
  Top Layer w10: D3.2 R22.1@-593.27,447.95
NetANT1_1: ANT1.1 C58.2 | length 627
  Top Layer w17.7: C58.2 147.72,236.7 ccw(c247.72,236.7) 177.01,165.99 313.52,29.48 ccw(c384.23,100.19) 384.23,0.19 ANT1.1
NetC1_1: C1.1 U1.28 X1.1 | length 252.7
  Top Layer w10: U1.28 419.46,301.54 X1.1@481.5,239.5 ; X1.1 506.5,239.5 532,214 532,133.28 C1.1
NetC2_1: C2.1 L1.1 U1.29 | length 320.4
  Top Layer w8: U1.29 439.15,304.85 450.17,293.83 503.98,293.83 504.15,294 533.28,294 547,280.28 547,179.28 L1.1 595.72,130.57 C2.1
NetC3_2: C3.2 U1.27 X1.3 | length 247
  Top Layer w10: U1.27 399.78,301.15 351.81,253.18 351.81,226.62 420.72,157.72 C3.2
NetC6_1: C6.1 U1.2 | length 142.4
  Top Layer w10: U1.2 614.61,368.79 v1(625,358.4)
  Bottom Layer w10: C6.1 618.32,351.72 v1(625,358.4)
NetC7_1: C7.1 U1.3 | length 209.1
  Top Layer w10: U1.3 614.67,388.47 v1(625,398.8)
  Bottom Layer w10: C7.1 583.08,398.8 v1(625,398.8)
NetC8_1: C8.1 U1.20 | length 124.6
  Top Layer w10: C8.1 288.13,499.15 288.13,451.87 312.16,427.84 U1.20
NetC17_1: C17.1 U3.56 | length 47.9
  Top Layer w10: C17.1 -539.28,524 U3.56@-508.95,493.67
NetC43_2: C43.2 R10.1 | length 45.3
  Top Layer w10: R10.1 C43.2
NetC44_2: C44.2 R11.1 | length 51
  Top Layer w10: R11.1 C44.2
NetC47_2: C47.2 R13.2 | length 41.9
  Top Layer w10: C47.2 R13.2
NetC56_2: C56.2 U2.1 | length 51.6
  Top Layer w17.7: U2.1 cw(c137.59,483.37) 175.75,521.53 C56.2
NetC57_1: C57.1 U2.3 | length 88.6
  Top Layer w17.7: C57.1 20.26,505 ccw(c20.26,586.64) 77.98,528.91 U2.3
NetC58_1: C58.1 U2.5 | length 43.4
  Top Layer w17.7: C58.1@112,411.28 U2.5
NetD1_1: D1.1 R7.2 | length 82.8
  Top Layer w10: D1.1 v1@-627.72,253.28
  Bottom Layer w10: v1(-625,256) -592.28,223.28 R7.2
NetD2_1: D2.1 R16.2 | length 115.9
  Top Layer w10: D2.1 -527.47,1 -474,1 -459.28,-13.72 R16.2
NetJ1_2: J1.2 U9.15 | length 384.7
  Top Layer w10: v1(-35,-551) -25.59,-541.59 J1.2
  Bottom Layer w10: U9.15 -37.21,-553.21 v1(-35,-551)
NetJ1_3: J1.3 U9.14 | length 445.3
  Top Layer w10: J1.3 0,-539 v1(12,-551)
  Bottom Layer w10: U9.14 -311.53,-533.53 -305,-527 -25.06,-527 -11,-541.06 -11,-542.47 -2.47,-551 v1(12,-551)
NetL1_2: L1.2 L2.1 | length 41.8
  Top Layer w10: L1.2 L2.1
NetL2_2: L2.2 U1.32 | length 89.7
  Top Layer w10: U1.32 536.6,318.59 567.66,287.53 L2.2
NetQ2_3: Q2.3 R3.2 | length 96.1
  Bottom Layer w10: Q2.3 -260.28,43 R3.2
NetR1_1: R1.1 U1.25 | length 87.5
  Top Layer w10: R1.1 313,271.18 U1.25
NetR2_1: R2.1 U3.42 | length 77.2
  Top Layer w10: U3.42 R2.1@-223.52,534.2
NetR8_1: R8.1 R10.2 U12.3 | length 113.7
  Top Layer w10: R8.1 -218.6,-373.69 U12.3 R10.2
NetR9_1: R9.1 R11.2 U11.6 | length 233.1
  Top Layer w10: U11.6 -514.8,-429.2 -505,-439 -423.15,-439 R11.2 -389.15,-368.57 R9.1
NetR12_1: R12.1 R13.1 U11.2 | length 176.7
  Top Layer w10: R13.1 R12.1@-498,-229.28 ; R12.1 -489.2,-229.51 U11.2
NetR14_1: R14.1 R15.2 R17.1 U13.3 | length 186
  Top Layer w10: U13.3 R15.2 -459.28,-140.57 R14.1 -495.72,-91.5 R17.1
NetR19_1: R19.1 R20.2 R21.1 U14.3 | length 155.3
  Top Layer w10: R20.2 -332.72,-257 R21.1 R19.1@-310.72,-189 ; R19.1 U14.3
NetR22_2: R22.2 U3.5 | length 139.8
  Top Layer w10: R22.2 -576.78,475.78 -569,468 -569,391.43 -555.79,378.21 U3.5
NetR23_2: R23.2 U3.7 | length 46.5
  Top Layer w10: R23.2@-578.55,323.22 -562.93,338.84 U3.7
NetR24_2: R24.2 U3.9 | length 98.4
  Top Layer w10: R24.2 -620,323.22 -596.25,299.47 U3.9
NRF8001_RESET: U1.19 U3.44 | length 766.8
  Top Layer w8: v1(-287,551) -287,521.21 -272.73,506.95 U3.44
  Top Layer w10: v2@304.13,523.87 304.13,461.03 317.63,447.53 U1.19
  Signal Layer 2 w10: v1(-287,551) -286,550 -245.06,550 -220.06,525 v2(303,525) v2@302,526
NRF8001_UBAL: B1.1 C56.1 | length 56.6
  Top Layer w17.7: B1.1@217.72,458.4 C56.1
OP_IN: C43.1 U15.9 | length 53.8
  Top Layer w10: C43.1 U15.9
PWM: U3.20 U16.3 | length 892.2
  Top Layer w10: U3.20 -410.53,142.18 -399.5,131.15 -399.5,119.5 v1(-387,107) ; v1@165.75,-387.75 v1(170,-392) U16.3@170,-344.65
  Signal Layer 2 w10: v1(-387,107) -383.03,107 -235,-41.03 -235,-42.44 23.06,-300.5 78.5,-300.5 v1(170,-392)
RF_N: B2.3 U3.38 | length 121
  Top Layer w10: U3.38 -202.77,378.21 -202.61,378.37 -194.63,378.37 -174,399 ; -173.97,399 B2.3
RF_P: B2.4 U3.37 | length 184.4
  Top Layer w10: U3.37 -202.77,358.53 -202.61,358.37 -186.35,358.37 -165.72,379 -159.94,379 -125.94,413 -104.85,413 B2.4
RF_SWITCH_1: U2.4 U4.4 | length 739.7
  Top Layer w10: U4.4 -292.52,42.67 -246.39,42.67 -112.51,176.55 19.15,176.55 62,219.4 62,430.25 U2.4
RF_SWITCH_2: U2.6 U3.27 U4.2 | length 850.7
  Top Layer w10: U4.2 -314,93 -302,105 -276,105 -257,124 -272.73,139.73 U3.27 ; v1(45,458) 50.03,458 68.52,476.49 127.51,476.49 137.59,466.41 U2.6
  Signal Layer 2 w10: v1(-255,124) -231,148 -9.4,148 45,202.4 v1(45,458)
ROM_CONTROL: U3.18 U9.31 | length 914
  Top Layer w10: v1(-450,95) U3.18@-450,171.42
  Signal Layer 1 w10: v1@-611,-443.53 -608.47,-441 v1(-606,-441)
  Signal Layer 2 w10: v1@-608,-441 v1(-606,-441) -634,-413 -634,56.94 -532.94,158 -481.06,158 -450,126.94 v1(-450,95)
  Bottom Layer w10: v1(-606,-441) -592.21,-454.79 U9.31
ROM_RESET: Q2.2 U9.32 | length 732
  Signal Layer 2 w10: v1(-606,-398) -606,-94.94 -580,-68.94 -580,37 -547,70 -420,70 v1(-419,69)
  Bottom Layer w10: v1(-606,-398) -606,-403.94 -574.84,-435.1 U9.32 ; v1(-419,69) -418.59,68.59 Q2.2
ROM_UART_RXD: U3.16 U9.30 | length 774.8
  Top Layer w10: v1(-491,134) -489.27,135.73 U3.16
  Bottom Layer w10: U9.30 -606.47,-474.47 -630,-450.94 -630,-450 -634,-446 -634,11.96 -567.77,78.19 -544.87,78.19 -491,132.06 v1(-491,134)
ROM_UART_TXD: U3.17 U9.2 | length 597.9
  Top Layer w10: v1(-488,97) -470.58,114.42 -469.58,114.42 -467,117 -467,168.94 U3.17
  Bottom Layer w10: U9.2 -513.21,-228.74 -498,-213.53 -498,87 v1(-488,97)
RTC_CLKOUT: U1.5 Y1.2 | length 447.8
  Top Layer w10: U1.5 613.64,427.84 v1(625,439.2)
  Bottom Layer w10: Y1.2 457.28,573.34 516.45,632.5 549.15,632.5 599.5,582.15 599.5,464.7 v1(625,439.2)
RTC_INT: Y1.6
SPI_MISO: U1.14 U3.49 U5.2 U10.7 | length 3047.4
  Top Layer w8: U3.49 -371.16,533.84 v1(-327,578) -314,591 393,591 399.78,584.22 U1.14
  Signal Layer 2 w8: v1(-327,578) -316,589 316.2,589 349,556.2 349,324.02 309,284.02 309,173.33 295,159.33 295,-382 198,-479 v1(198,-529)
  Bottom Layer w8: U10.7@-528,505.8 U10.7 -529,499 -518.7,488.7 -458.03,488.7 -389.73,557 -350.47,557 -329.47,578 v1(-327,578) ; v1(198,-529) U5.2
SPI_MOSI: U1.13 U3.50 U5.5 U10.6 | length 3215.2
  Top Layer w8: v1(-360,580) -335,605 399.4,605 419.46,584.94 U1.13
  Top Layer w10: U3.50 -390.84,549.16 v1(-360,580)
  Signal Layer 2 w8: v1(-360,580) -337,603 322,603 363,562 363,318.22 327.31,282.53 327.31,171.83 309,153.53 309,-339 351,-381 552,-381 v1(600,-429)
  Signal Layer 2 w10: v1(-360,580) v1@-355,580
  Bottom Layer w8: U10.6 -509.31,502.7 -463.83,502.7 -383.89,582.64 -362.64,582.64 v1(-360,580) ; U5.5 v1(600,-429)
SPI_SCK: U1.11 U3.52 U5.6 U10.4 | length 3307.5
  Top Layer w8: v1(-403,608) -378,633 411,633 458.83,585.17 U1.11
  Top Layer w10: U3.52 -430.21,580.79 v1(-403,608)
  Signal Layer 2 w8: v1(-403,608) -383,608 -374,617 475.2,617 602,490.2 602,295 635,262 635,-443 v1(599,-479)
  Bottom Layer w10: U10.4 -467.19,537.31 -403,601.5 v1(-403,608) ; U5.6 v1(599,-479)
TX_1: U15.4 U16.6 | length 197.1
  Top Layer w10: U15.4 41.53,-312.47 v1(78,-276) ; v1(85,-348) 121.76,-311.24 U16.6
  Bottom Layer w10: v1(78,-276) 85,-283 v1(85,-348)
TX_2: U15.6 U16.1 U16.4 | length 703.9
  Top Layer w10: v1(-77,-276) -40.53,-312.47 U15.6 ; U16.1 103.5,-367.58 103.5,-403.15 117.85,-417.5 179.15,-417.5 194.5,-402.15 194.5,-334.47 ; U16.4@171.26,-311.24 194.5,-334.47 ; v1@194.5,-252.5 194.5,-334.47
  Bottom Layer w10: v1(-77,-276) -50.5,-249.5 192.5,-249.5 v1(195,-252)
TXRX_SELECT: U3.19 U15.2 U15.8 | length 782.4
  Top Layer w10: v1@-430.21,127.21 U3.19 ; v1(-101,-334) -86.28,-348.72 -34.62,-348.72 U15.8 U15.2
  Signal Layer 2 w10: v1(-424,121) -411.5,108.5 -411.5,96.85 -397.15,82.5 -381.16,82.5 -251,-47.66 -251,-49.07 -101.5,-198.57 -101.5,-333.5 v1(-101,-334)
UL1: U15.3 UT1.2 | length 406.3
  Top Layer w10: U15.3 64.84,-332.16 163.39,-233.61 UT1.2
UL2: U15.7 UT1.1 | length 406.3
  Top Layer w10: UT1.1 -163.39,-233.61 -64.84,-332.16 U15.7
VBAT: C28.1 C32.1 U7.1 U7.3 U8.5 | length 469.5
  Bottom Layer w20: C32.1@266.31,-253.6 U8.5 370.39,-203 ; U7.1@316.39,-142 C28.1 264.72,-90.28 286.4,-68.6 U7.3 ; U7.1 370.39,-196 v4(475,-196)
VBUS: C31.1 C35.1 FB1.2 J1.1 U8.1 | length 916.2
  Top Layer w10: C35.1 -231,-519 FB1.2 -96.8,-554 -51.18,-508.38 J1.1
  Top Layer w20: J1.1 v1@-51.18,-439.18
  Bottom Layer w20: v1(-51,-439) 38.5,-439 177.5,-300 333.4,-300 379.8,-253.6 U8.1 C31.1@497.69,-253.6
VCC3.3: C4.1 C5.1 C9.1 C10.1 C11.1 C12.1 C13.1 C14.1 C15.1 C16.1 C18.1 C19.1 C25.1 C26.1 C29.1 C30.1 C37.1 C38.1 C39.1 C40.1 C41.1 C42.1 C49.1 C50.1 C53.1 C54.1 D3.1 Q1.2 U1.1 U1.9 U1.24 U1.26 U3.10 U3.15 U3.24 U3.33 U3.36 U3.39 U3.40 U3.41 U3.43 U3.55 U4.5 U6.1 U7.5 U10.1 U10.14 U11.8 U12.5 U13.5 U14.5 U15.5 U16.5 Y1.5 | length 4277.2
  Top Layer w10: D3.1 v3@-626.73,464.73 ; v1(-625,294) -610.79,279.79 U3.10 ; U13.5 v1@-602.59,-60.41 ; C38.1 -581.28,561 v1(-547,561) ; v1(-532,125) -532,126.94 -508.95,149.99 U3.15 ; C16.1@-528.72,598 C37.1 -547,582.72 v1(-547,561) ; U3.55 -489.27,509.23 -541.04,561 v1(-547,561) ; U11.8 -440.4,-367 v1(-432,-367) ; U14.5 -336.5,-86 v1@-254,-86 ; v1@-331.79,125.21 U3.24 ; U12.5 -268.26,-433 v1(-257,-433) ; U4.5 -252,-40.81 v1(-252,-88) ; v1(-255,526) -253.05,524.05 U3.43 ; U3.33 v1@-174.79,279.79 ; U3.36 -183.25,338.84 -159.09,363 v1(-142,363) ; U3.39 -198.1,397.9 -189,407 v1(-189,486) ; U3.40 -189.42,417.58 ; U3.41 -190.27,437.27 ; v2(-48,21) v2@7,76 ; U15.5 8,-294.63 v1(8,-221) ; v2(16,-38) v2(78,24) ; U16.5 150,-284 v1(160,-274) ; v2(223,327) 285.27,327 ccw(c285.27,329.45) C4.1 308.51,327.72 U1.24 ; v3(335,121) 335.81,121.81 335.81,259.81 380.09,304.09 U1.26 ; U1.9 520.08,539.28 C9.1 603.28,539.28 v1(624,560) ; U1.1 559.82,318 v1(625,318) 625,183 v1(609,167) ; v1(570,477) C9.1@570,533.28
  Signal Layer 1 w10: v1(-625,294) -587.35,294 -532,238.65 v1(-532,125)
  Bottom Layer w10: v1(-625,294) -617.94,294 -603.94,280 -557.72,280 C10.1 ; v1(-604,-59) -604,-30.72 -603,-29.72 C50.1@-555,-29.72 ; C11.1 -556,101 v1(-532,125) ; v1(-547,561) -547,588 ; U10.14@-547,605.51 -547,588 ; U10.1 -492.76,596.38 -499.83,589.31 -545.69,589.31 -547,588 ; v1(-432,-367) C40.1@-348.28,-367 ; v1(-332,125) C12.1@-332,158.72 ; C42.1 C41.1 v1(-257,-433) ; C15.1 -281.28,499.72 v1(-255,526) ; v1(-252,-88) -252,-98.2 U6.1 -140.31,-140.6 -140.31,-115 ; C19.1@-223.28,486 v1(-189,486) -200,497 C18.1 ; C13.1 v1(-173,278) ; v1(-142,363) -135,356 C14.1 ; C53.1@-140.31,-92.6 -140.31,-115 ; C53.1 C53.1@-138.52,-91 ; C26.1@-40.72,-94.72 -61,-115 ; v1(8,-221) 8,-193.53 C25.1 -61,-124.53 -61,-115 ; v2(88,327) v2(223,327) ; v2(249,-40) 320,31 320,106 v3(335,121) ; v1(463,-334) 491.59,-305.41 Q1.2 ; Y1.5 v1@570,478.53 ; C5.1 625,282.72 v1(625,318) ; -140.31,-115 -61,-115
  Bottom Layer w15: v6@466.6,-143.4 v6@473,-137 ; v6(473,-143.4) v6@473,-137 ; C30.1@473,-92.28 v6@473,-137
  Bottom Layer w20: U7.5 v6@466.6,-143.4 ; v6(473,-143.4) 505.07,-143.4 C29.1
  other v2: 7,78
  other v3: -627,465
VCC3.3-USB: C33.1 Q2.1 R6.1 R7.1 U9.1 U9.16 | length 1426.1
  Top Layer w10: C33.1 v1@-571,-405
  Signal Layer 2 w10: v1(-574,-402) -497,-402 ; v1(-421,-33) -421,-294 -497,-370 -497,-402 ; v1(-345.53,-610) -345.53,-555.53 -497,-404.06 -497,-402
  Bottom Layer w10: R7.1@-627.5,219.78 -627.5,173.85 -611.65,158 -402,158 -341.68,97.68 -341.68,50.25 -370.4,21.54 Q2.1 ; v1@-570.43,-405.57 U9.1 ; U9.16 -337,-601.47 v1(-345.53,-610)
  Bottom Layer w20: v1(-421,-33) R6.1 -378.72,9.09 Q2.1
VCC_FLASH: C24.2 Q1.3 R5.1 U5.8 | length 880.2
  Bottom Layer w10: R5.1 162.28,-577.22 219.06,-634 495.51,-634 U5.8 598,-579 634,-543 634,-362.72 C24.2 602.28,-331 Q1.3
VREF: C27.1 C45.1 C46.1 C48.1 C52.1 C55.1 U6.2 U11.3 U11.5 U12.1 U13.4 U14.4 | length 1792.1
  Top Layer w10: v1(-578,-366) -564.6,-366 U11.5 ; v1(-569,-259) -564.21,-254.21 -529.79,-254.21 -514.8,-269.2 U11.3 ; U13.4 v1(-551.41,-60) ; U14.4 -312.31,-59 v1(-283,-59) ; U12.1 -202,-474.74 v1(-202,-498)
  Signal Layer 2 w10: v1(-578,-366) -578,-268 v1(-569,-259) -563,-253 -563,-71.59 v1(-551.41,-60) -497,-5.59 -327.01,-5.59 -283,-49.6 v1(-283,-59)
  Bottom Layer w10: C52.1@-591.72,-159 C46.1 -591.72,-236.28 v1(-569,-259) ; v1(-578,-366) C48.1@-578,-327.28 ; C55.1 -323.28,-59 v1(-283,-59) ; v1@-278,-60.6 -278,-108.26 -324.93,-155.19 -324.93,-194.37 -318.49,-200.81 -224.19,-200.81 U6.2 C27.1@-111.13,-215.4 ; C45.1 v1(-202,-498) U6.2@-202,-223
VUSB: C34.1 C36.1 FB1.1 U9.19 | length 363.2
  Top Layer w10: v1(-246,-623) -239.28,-616.28 C36.1 -210.43,-575 FB1.1
  Bottom Layer w10: U9.19 -434.47,-620.47 -420.94,-634 -257,-634 v1(-246,-623) ; -301.53,-630.47 C34.1
XOSC32M_Q1: C22.2 U3.34 X2.3 | length 265.4
  Top Layer w10: U3.34@-223.52,301 U3.34 -185.47,299.47 -182.94,302 -163.06,302 -121.06,260 -121,260 -113,252 -69.11,252 ; -66.35,254.76 -42.36,278.74 X2.3 C22.2@5.74,284.46
XOSC32M_Q2: C20.1 U3.35 X2.1 | length 262
  Top Layer w10: U3.35 -110.02,319.16 X2.1 -87.64,358.36 -73,373 C20.1
pads on no net: ANT1.2 ANT1.3 ANT1.4 B1.6 J1.4 J1.6 U1.4 U1.7 U1.10 U1.15 U3.2 U3.3 U3.4 U3.6 U3.8 U3.12 U3.21 U3.22 U3.25 U3.31 U3.46 U3.47 U4.1 U7.4 U8.4 U9.3 U9.5 U9.6 U9.7 U9.8 U9.9 U9.10 U9.11 U9.12 U9.13 U9.18 U9.21 U9.22 U9.23 U9.25 U9.27 U9.28 U9.29 U10.2 U10.3 U10.5 U10.10 U10.15 X2.2 X2.4 Y1.4 Y1.7

## Polygon pours and split planes (outlines as drawn)
GND on Bottom Layer "BOT_GND" (solid, pour order 6): -550,-650 cw(c-550,-550) -650,-550 -650,550 cw(c-550,550) -550,650 550,650 cw(c550,550) 650,550 650,-550 cw(c550,-550) 550,-650
VCC3.3 on Signal Layer 2 "VCC Plane" (solid, pour order 7): -550,-650 cw(c-550,-550) -650,-550 -650,550 cw(c-550,550) -550,650 550,650 cw(c550,550) 650,550 650,-550 cw(c550,-550) 550,-650
GND on Top Layer "TOP-GND" (solid, remove dead copper, pour order 5): -550,-650 cw(c-550,-550) -650,-550 -650,550 cw(c-550,550) -550,650 550,650 cw(c550,550) 650,550 650,-550 cw(c550,-550) 550,-650
GND on Signal Layer 1 "GND Plane" (solid, pour order 3): -550,-650 cw(c-550,-550) -650,-550 -650,550 cw(c-550,550) -550,650 550,650 cw(c550,550) 650,550 650,-550 cw(c550,-550) 550,-650

## Keep-outs
Keep-Out Layer:
  the board outline again, w10

## Silkscreen, mask and mechanical layers (free items; w line width, h text height)
Top Overlay:
  circle w10: c0,0 r255
  region: -618.76,-590.24 -578.46,-590.24 -578.46,-568.73 -586.66,-568.73 -586.66,-549.27 -566.68,-577.27 -565.32,-577.27 -545,-549.27 -545,-568.73 -553.2,-568.73 -553.2,-590.24 -512.9,-590.24 -512.9,-568.73 -521.1,-568.73 -521.1,-536.29 -512.9,-536.29 -512.9,-514.78 -544.83,-514.78 -565.32,-543.12 -566.34,-543.12 -586.83,-514.78 -618.76,-514.78 -618.76,-536.29 -610.9,-536.29 -610.9,-568.73 -618.76,-568.73
  text "Huang," at -495,-557 h20
  text "Kuo" at -496,-592 h20
  text "Opo4" at -426,-592 h20
  text "2014" at -587,-622 h20